# Altium PCB CH32F&Vx0xV-R1-1v1.PcbDoc (part 1 of 2)
Units mm, origin at the board's own origin, x right, y up, seen from the top; angles counter-clockwise.
Board outline 74 x 103.43 mm, 2 copper layers (Top Layer, Bottom Layer); 78 components, 138 nets, 482 pads, 658 vias.
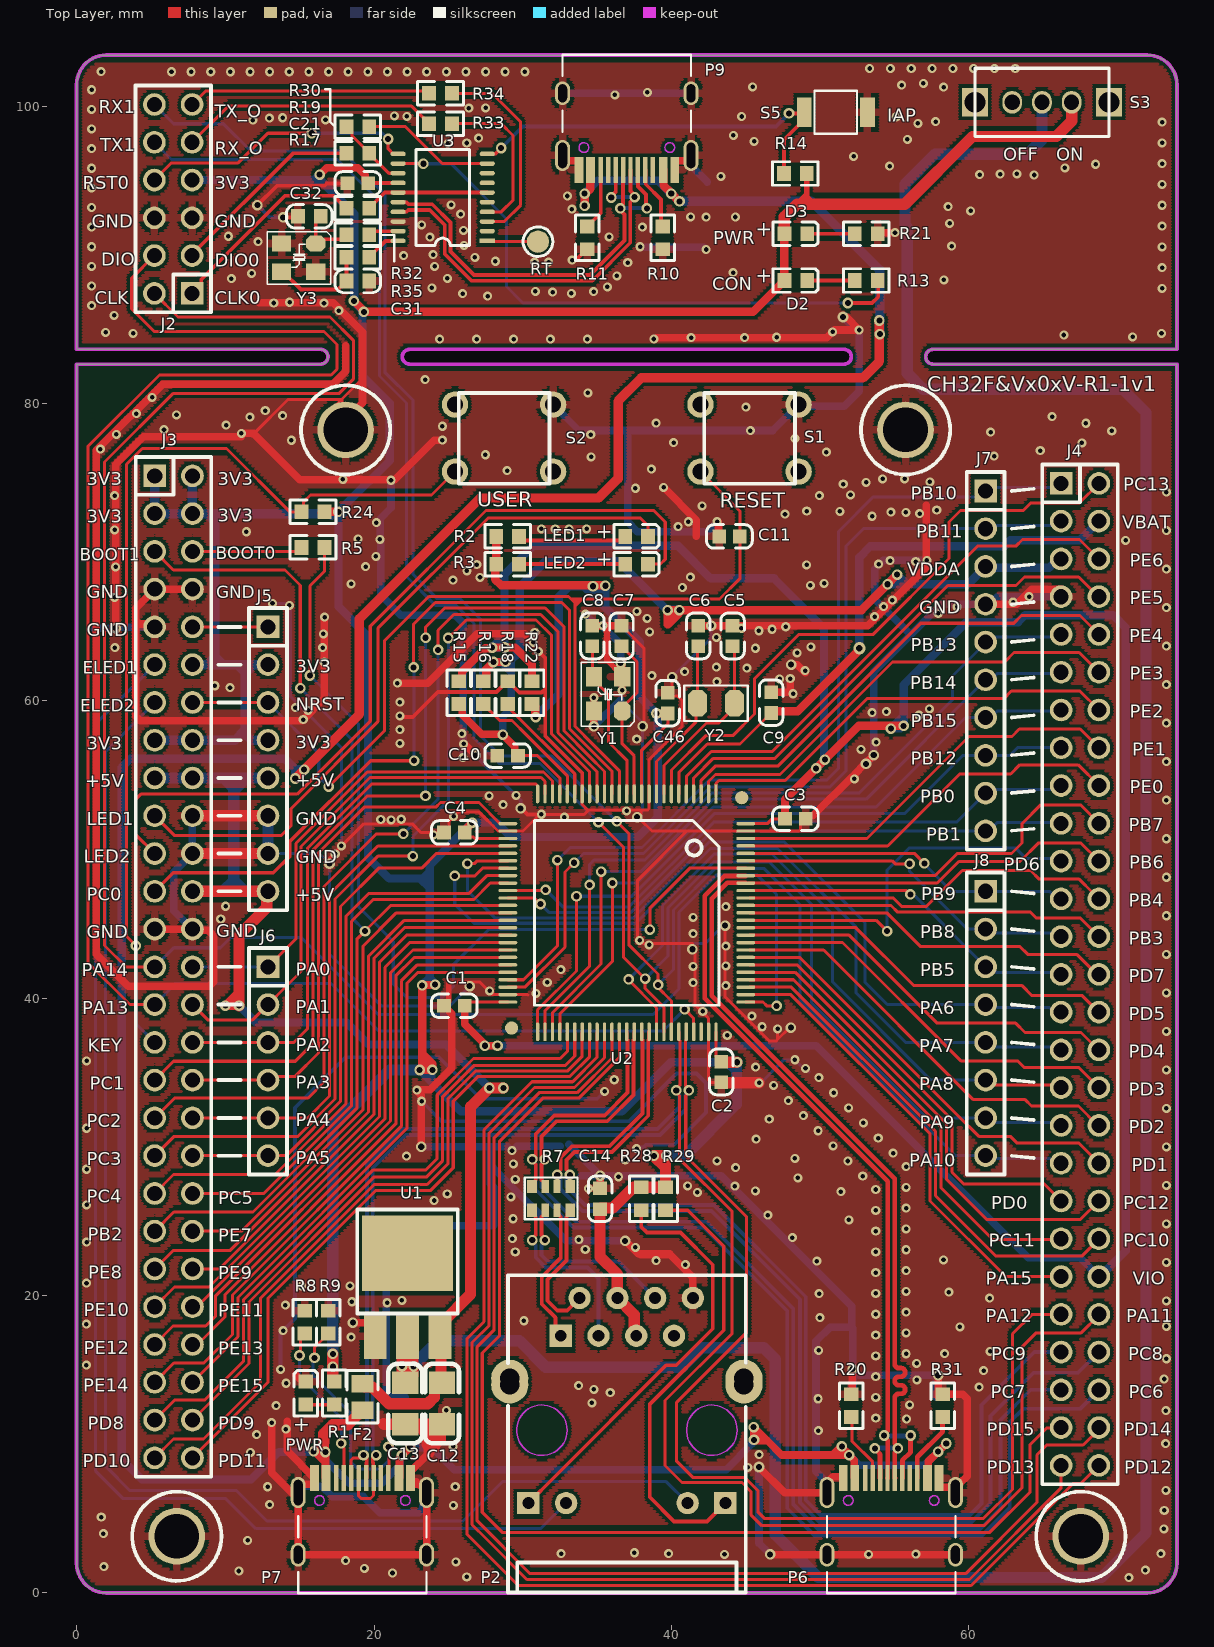
[diagram p0: Top Layer view]
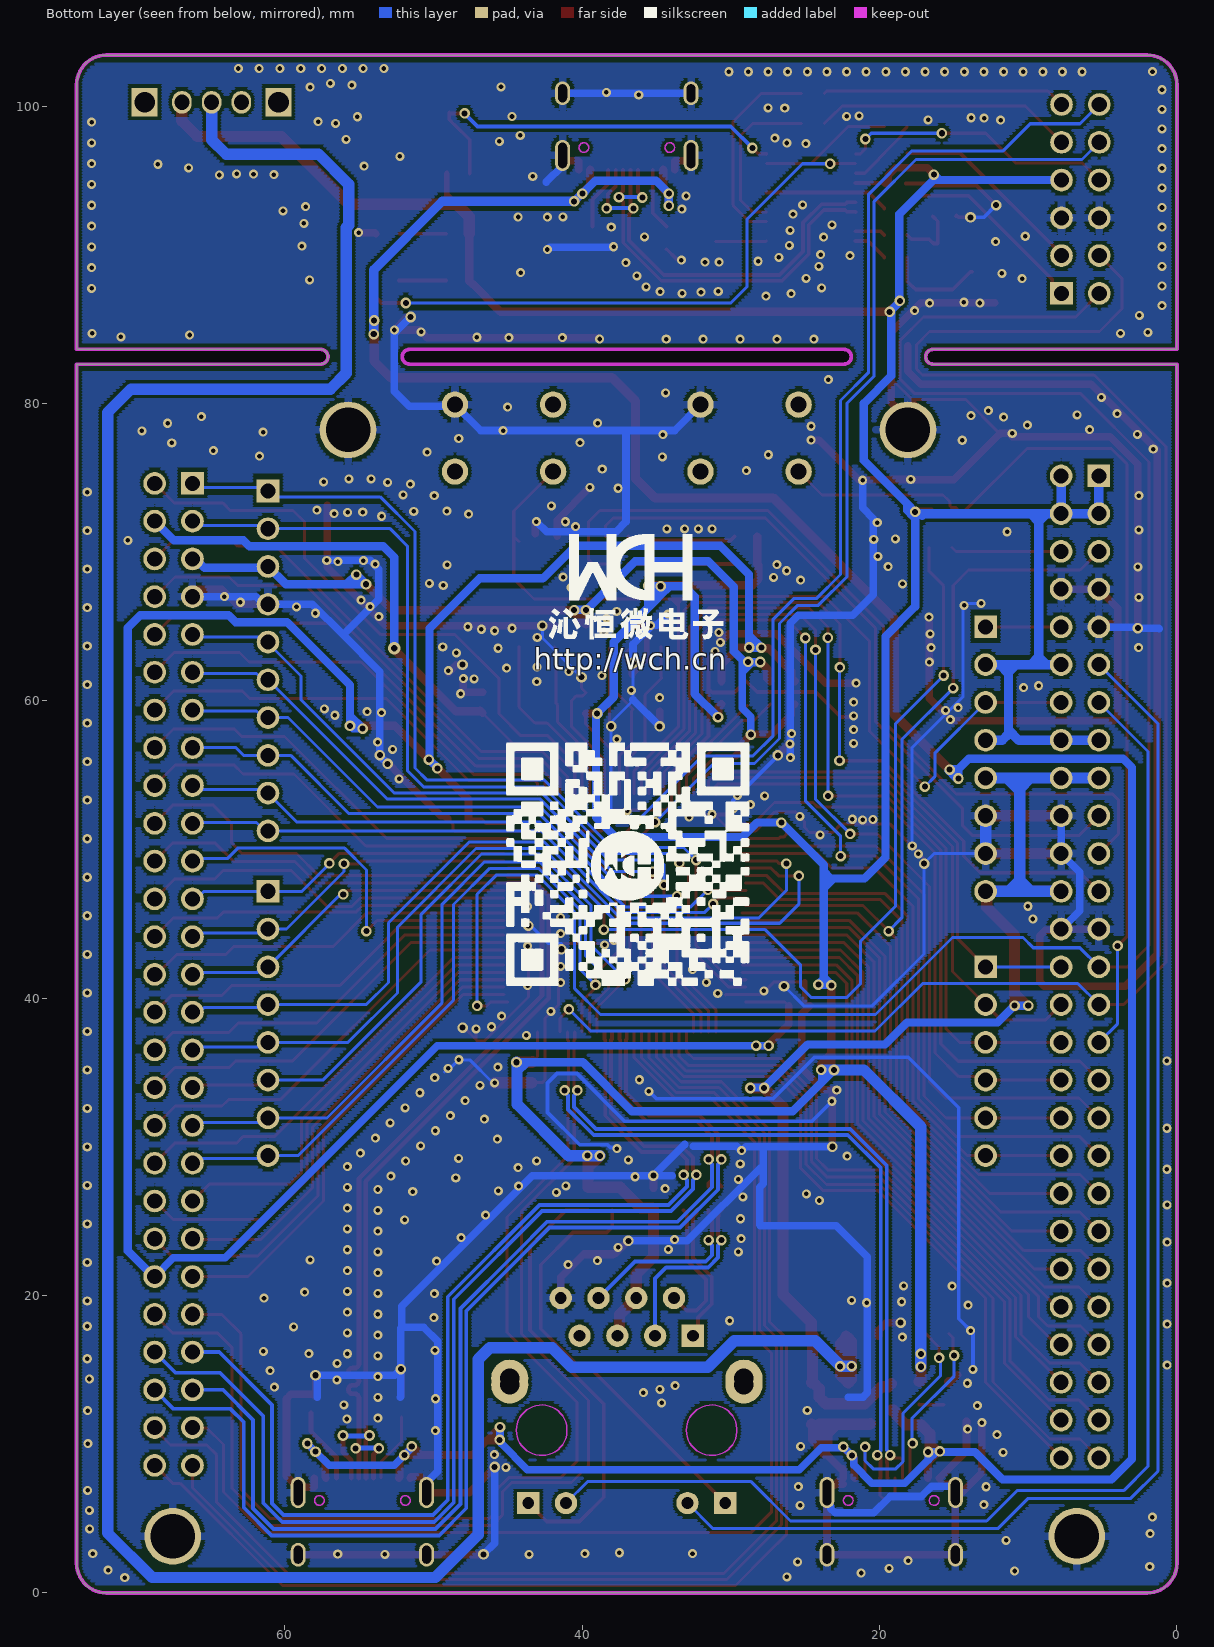
[diagram p1: Bottom Layer view, seen from below]

## Layer stack, top to bottom
Top Solder: solder mask 0.0102, Solder Resist, Dk 3.5
Top Layer: signal copper 0.0356
Dielectric 1: dielectric 0.32, FR-4, Dk 4.8
Bottom Layer: signal copper 0.0356
Bottom Solder: solder mask 0.0102, Solder Resist, Dk 3.5

## Board outline
2,0 cw(c2,2) 0,2 0,82.638 16.4,82.638 ccw(c16.4,83.138) 16.4,83.638 0,83.638 0,101.429 cw(c2,101.429) 2,103.429 72,103.429 cw(c72,101.429) 74,101.429 74,83.638 57.6,83.638 ccw(c57.6,83.138) 57.6,82.638 74,82.638 74,2 cw(c72,2) 72,0
cut-out: 22.4,82.638 51.65,82.638 51.6,82.636 ccw(c51.6,83.138) 51.6,83.641 51.65,83.638 22.4,83.638 ccw(c22.4,83.138)

## Design rules (kind name [scope] priority, off if disabled: settings)
Clearance Clearance_1 [InPolygon] p1: gap=0.203 ignorepadtopadclearanceinfootprint=FALSE
Clearance [All] p2: gap=0.14 ignorepadtopadclearanceinfootprint=FALSE
ComponentClearance [All] p1 off: gap=0.254 collisioncheckmode=3 verticalgap=0.254 showdistances=FALSE
DiffPairsRouting [All] p1: maxlimit=0.254 minlimit=0.14 mostfreqgap=0.203 toplayer_minwidth=0.152 toplayer_maxwidth=0.381 toplayer_prefwidth=0.254 bottomlayer_minwidth=0.152 bottomlayer_maxwidth=0.381 bottomlayer_prefwidth=0.254 maxuncoupledlength=12.7
MinimumSolderMaskSliver [All] p1 off: minsoldermaskwidth=0.254
PolygonConnect PolygonConnect_1 [IsVia] p1: connectstyle=Direct reliefconductorwidth=0.254 reliefentries=4 polygonreliefangle="90 Angle" airgapwidth=0.254
PolygonConnect [All] p2: connectstyle=Relief reliefconductorwidth=0.508 reliefentries=4 polygonreliefangle="90 Angle" airgapwidth=0.254
RoutingVias [All] p1: holewidth=0.406 width=0.711 viastyle="Through Hole" minholewidth=0.305 minwidth=0.61 maxholewidth=0.711 maxwidth=1.27
SilkToSilkClearance [All] p1 off: silktosilkclearance=0.254
SilkToSolderMaskClearance [IsPad] p1 off: minsilkscreentomaskgap=0.254 clearancetoexposedcopper=TRUE
SolderMaskExpansion [All] p1: expansion=0.102 istentingtop=FALSE
Width [All] p1: maxlimit=2.54 minlimit=0.152 preferedwidth=0.254
25 further rules are at their usual default settings.

## Classes and differential pairs
component class CH32F&Vx0xV-R1-1v1: C1 C2 C3 C4 C5 C6 C7 C8 C9 C10 C11 C12 C13 C14 C21 C31 C32 C46 D2 D3 F2 J2 J3 J4 J5 J6 J7 J8 LED1 LED2 P2 P6 P7 P9 PWR R1 R2 R3 R5 R7 R8 R9 R10 R11 R13 R14 R15 R16 R17 R18 R19 R20 R21 R22 R24 R28 R29 R30 R31 R32 R33 R34 R35 RT S1 S2 S3 S5 U1 U2 U3 Y1 Y2 Y3
differential pair ERX1: +ERXP1 -ERXN1
differential pair ETX1: +ETXN1 -ETXP1

## Components (designator, comment, footprint, x,y, rotation, side; value= is the part's Value field where it differs from the comment)
C1 "0.1uF" 0603_C#1 24.706,39.486 r0 top
C2 "0.1uF" 0603_C#1 43.346,34.34 r90 top
C3 "0.1uF" 0603_C#1 47.642,52.059 r0 top
C4 "0.1uF" 0603_C#1 24.706,51.145 r0 top
C5 "12pF" 0603_C#1 44.112,63.663 r90 top
C6 "12pF" 0603_C#1 41.8,63.663 r90 top
C7 "22pF" 0603_C#1 36.644,65.059 r270 top
C8 "22pF" 0603_C#1 34.688,65.059 r270 top
C9 "0.1uF" 0603_C#1 46.704,60.576 r270 top
C10 "0.1uF" 0603_C#1 28.285,56.316 r0 top
C11 "0.1uF" 0603_C#1 43.205,71.051 r0 top
C12 "10uF" 3216_C 24.572,14.136 r90 top
C13 "10uF" 3216_C 22.1,14.136 r90 top
C14 "1uF" 0603_C#1 35.199,27.21 r270 top
C21 "0.1uF" 0603_C#1 19.612,94.793 r180 top
C31 "NC(22pF)" 0603_C#2 19.683,88.232 r180 top
C32 "NC(22pF)" 0603_C#2 14.877,92.58 r0 top
C46 "0.1uF" 0603_C#1 39.743,59.146 r90 top
D2 "BLUE" 0603+ 47.599,88.266 r0 top
D3 "RED" 0603+ 47.599,91.402 r0 top
F2 "500mA" 0805 19.221,12.295 r90 top
J2 "Header 6X2" IDC12-2.54mm 7.765,87.401 r180 top
J3 "HEADER 27x2" IDC54-2.54MM 5.25,75.128 r0 top locked
J4 "HEADER 27x2" IDC54-2.54MM 66.21,74.62 r0 top locked
J5 "Header 8" SIP8-2.54mm 12.87,64.968 r0 top locked
J6 "Header 6" SIP6-2.54MM 12.87,42.108 r0 top locked
J7 "Header 10" SIP10-2.54mm 61.13,74.112 r0 top locked
J8 "Header 8" SIP8-2.54mm 61.13,47.188 r0 top locked
LED1 "LED1   blue" 0603+ 36.891,71.051 r0 top
LED2 "LED2  blue" 0603+ 36.891,69.193 r0 top
P2 "HR911105A" HR911105A 32.555,17.295 r0 top
P6 "USBHS" TYPE-C-Receptacle-2.0 54.783,7.722 r0 top
P7 "USBFS" TYPE-C-Receptacle-2.0 19.217,7.722 r0 top
P9 "TYPE-C" TYPE-C-Receptacle-2.0 37,95.706 r180 top
PWR "POWER  red" 0603+ 15.42,12.675 r90 top
R1 "1K" 0603 17.325,12.675 r90 top
R2 "1K" 0603 28.218,71.051 r0 top
R3 "1K" 0603 28.218,69.193 r0 top
R5 "10K" 0603 15.127,70.311 r0 top
R7 "0Ω" RCA-8P4R-0603 31.908,26.538 r180 top
R8 "NC(5.1K)" 0603 15.327,18.98 r270 top
R9 "NC(5.1K)" 0603 16.918,18.98 r270 top
R10 "NC(5.1K)" 0603 39.41,91.902 r270 top
R11 "NC(5.1K)" 0603 34.337,91.902 r270 top
R13 "1K" 0603 53.873,88.266 r180 top
R14 "10K" 0603 47.564,95.462 r0 top
R15 "0Ω" 0603 25.708,61.316 r270 top
R16 "0Ω" 0603 27.347,61.316 r270 top
R17 "100" 0603 18.143,93.113 r0 top
R18 "0Ω" 0603 28.986,61.316 r270 top
R19 "100" 0603 18.143,96.816 r0 top
R20 "NC(5.1K)" 0603 52.088,13.365 r270 top
R21 "1K" 0603 53.873,91.402 r180 top
R22 "0Ω" 0603 30.625,61.316 r270 top
R24 "10K" 0603 15.127,72.706 r0 top
R28 "1K" 0603 37.973,27.281 r270 top
R29 "1K" 0603 39.605,27.281 r270 top
R30 "1K" 0603 18.143,98.608 r0 top
R31 "NC(5.1K)" 0603 58.237,13.365 r270 top
R32 "NC(0R)" 0603 19.683,91.329 r180 top
R33 "270" 0603 23.701,98.814 r0 top
R34 "270" 0603 23.701,100.855 r0 top
R35 "NC(0R)" 0603 19.683,89.821 r180 top
RT "Testpoint" TESTPOINT1 31.026,90.879 r0 top
S1 "RESET" KEYX 41.955,75.418 r90 top locked
S2 "USER" KEYX 25.445,75.418 r90 top locked
S3 "SW" SW1 64.92,100.252 r0 top
S5 "KEY" 贴片按键 48.938,99.583 r0 top
U1 "1117-3.3V" SOT-223 20.072,17.271 r0 top
U2 "CH32V307V" LQFP100 43,53.74 r180 top locked
U3 "CH32V305F" TSSOP20 27.615,90.93 r90 top
Y1 "8M" XT3225 36.69,59.31 r90 top
Y2 "32.768k" FC-135 44.249,59.832 r180 top
Y3 "NC(12M)" XT3225 16.083,90.753 r180 top
? "Comment" HOLE 18.092,78.217 r0 top
? "Comment" HOLE 55.746,78.217 r0 top
? "Comment" HOLE 6.736,3.81 r0 top
? "Comment" HOLE 67.532,3.81 r0 top

## Footprints (in the part's own frame and the unit in brackets; to place one, negate y for a bottom-side part, rotate by r counter-clockwise, add the part's x,y. Pads: shape width x height; smd on the part's side, far side on the other; paste and mask are expansions set on the pad)
0603 [mm]
  rect 0.93x0.98 smd: 1(0,0) 2(1.54,0)
  silkscreen extent -0.76,-0.79 2.3,0.79
0603+ [mm]
  rect 0.93x0.98 smd: 1(0,0) 2(1.54,0)
  silkscreen extent -0.76,-0.79 2.27,0.79
0603_C#1 [mil]
  rect 36x36 smd: 1(0,0) 2(55,0)
  silkscreen extent -33,-31 88,31
0603_C#2 [mil]
  rect 36.61x38.58 smd mask+2: 1(0,0) 2(60.63,0)
  silkscreen extent -30,-31 91,31
0805 [mm]
  rect 1.16x1.47 smd: 1(0,0) 2(1.78,0)
  silkscreen extent -0.88,-1.04 2.66,1.03
3216_C [mil]
  rect 60x70 smd: 1(0,0) 2(-110,0)
  silkscreen extent -160,-45 50,45
FC-135 [mil]
  oct 50x70 smd: 1(0,0) 2(98.43,0)
  silkscreen extent -35,-47 133,47
HOLE [mm]
  round 3.81 hole 3: 0(0,0)
  silkscreen extent -3,-3 3,3
HR911105A [mm]
  rect 1.5x1.5 hole 0.8: 1(0,0) 9(-2.175,-11.252) 12(11.075,-11.252)
  round 1.5 hole 0.8: 2(1.27,2.54) 3(2.54,0) 4(3.81,2.54) 5(5.08,0) 6(6.35,2.54) 7(7.62,0) 8(8.89,2.54) 10(0.365,-11.252) 11(8.535,-11.252)
  round 2.5 hole 1.3: ""(-3.43,-2.852) ""(-3.43,-3.3) ""(12.32,-3.3) ""(12.32,-2.852)
  Keep-Out Layer circle w0.1: c-1.265,-6.352 r1.7
  Keep-Out Layer circle w0.1: c10.165,-6.352 r1.7
  silkscreen extent -3.55,-17.27 12.45,4.06
IDC12-2.54mm [mil]
  rect 60x60 hole 40: 1(0,0)
  round 60 hole 40: 2(100,0) 3(0,-100) 4(100,-100) 5(0,-200) 6(100,-200) 7(0,-300) 8(100,-300) 9(0,-400) 10(100,-400) 11(0,-500) 12(100,-500)
  silkscreen extent -50,-550 150,50
IDC54-2.54MM [mil]
  rect 60x60 hole 40: 1(0,0)
  round 60 hole 40: 2(100,0) 3(0,-100) 4(100,-100) 5(0,-200) 6(100,-200) 7(0,-300) 8(100,-300) 9(0,-400) 10(100,-400) 11(0,-500) 12(100,-500) 13(0,-600) 14(100,-600) 15(0,-700) 16(100,-700) 17(0,-800) 18(100,-800) 19(0,-900) 20(100,-900) 21(0,-1000) 22(100,-1000) 23(0,-1100) 24(100,-1100) 25(0,-1200) 26(100,-1200) 27(0,-1300) 28(100,-1300) 29(0,-1400) 30(100,-1400) 31(0,-1500) 32(100,-1500) 33(0,-1600) 34(100,-1600) 35(0,-1700) 36(100,-1700) 37(0,-1800) 38(100,-1800) 39(0,-1900) 40(100,-1900) 41(0,-2000) 42(100,-2000) 43(0,-2100) 44(100,-2100) 45(0,-2200) 46(100,-2200) 47(0,-2300) 48(100,-2300) 49(0,-2400) 50(100,-2400) 51(0,-2500) 52(100,-2500) 53(0,-2600) 54(100,-2600)
  silkscreen extent -50,-2650 150,50
KEYX [mil]
  round 70 hole 42: 1(0,0) 2(0,-259.84) 3(177.17,-259.84) 4(177.17,0)
  silkscreen extent -32,-250 208,-10
LQFP100 [mm]
  round 0.889 smd: 0(-1.727,0.254) 0(13.746,15.748)
  rect 0.229x1.27 smd: 1(0,0)
  oval 0.229x1.27 smd: 2(0.5,0) 3(1,0) 4(1.5,0) 5(2,0) 6(2.5,0) 7(3,0) 8(3.5,0) 9(4,0) 10(4.5,0) 11(5,0) 12(5.5,0) 13(6,0) 14(6.5,0) 15(7,0) 16(7.5,0) 17(8,0) 18(8.5,0) 19(9,0) 20(9.5,0) 21(10,0) 22(10.5,0) 23(11,0) 24(11.5,0) 25(12,0) 51(12,16) 52(11.5,16) 53(11,16) 54(10.5,16) 55(10,16) 56(9.5,16) 57(9,16) 58(8.5,16) 59(8,16) 60(7.5,16) 61(7,16) 62(6.5,16) 63(6,16) 64(5.5,16) 65(5,16) 66(4.5,16) 67(4,16) 68(3.5,16) 69(3,16) 70(2.5,16) 71(2,16) 72(1.5,16) 73(1,16) 74(0.5,16) 75(0,16)
  oval 1.27x0.229 smd: 26(14,2) 27(14,2.5) 28(14,3) 29(14,3.5) 30(14,4) 31(14,4.5) 32(14,5) 33(14,5.5) 34(14,6) 35(14,6.5) 36(14,7) 37(14,7.5) 38(14,8) 39(14,8.5) 40(14,9) 41(14,9.5) 42(14,10) 43(14,10.5) 44(14,11) 45(14,11.5) 46(14,12) 47(14,12.5) 48(14,13) 49(14,13.5) 50(14,14) 76(-2,14) 77(-2,13.5) 78(-2,13) 79(-2,12.5) 80(-2,12) 81(-2,11.5) 82(-2,11) 83(-2,10.5) 84(-2,10) 85(-2,9.5) 86(-2,9) 87(-2,8.5) 88(-2,8) 89(-2,7.5) 90(-2,7) 91(-2,6.5) 92(-2,6) 93(-2,5.5) 94(-2,5) 95(-2,4.5) 96(-2,4) 97(-2,3.5) 98(-2,3) 99(-2,2.5) 100(-2,2)
  silkscreen extent -0.22,1.79 12.21,14.21
RCA-8P4R-0603 [mm]
  rect 0.65x0.9 smd: 1(-1.28,-0.8) 4(1.28,-0.8) 5(1.28,0.8) 8(-1.28,0.8)
  rect 0.5x0.9 smd: 2(-0.4,-0.8) 3(0.4,-0.8) 6(0.4,0.8) 7(-0.4,0.8)
  silkscreen extent -1.78,-1.4 1.78,1.4, body extent -1.6,-0.8 1.6,0.8, height 0.6
SIP6-2.54MM [mil]
  rect 60x60 hole 40: 1(0,0)
  round 60 hole 40: 2(0,-100) 3(0,-200) 4(0,-300) 5(0,-400) 6(0,-500)
  silkscreen extent -50,-550 50,50
SIP8-2.54mm [mil]
  rect 60x60 hole 40: 1(0,0)
  round 60 hole 40: 2(0,-100) 3(0,-200) 4(0,-300) 5(0,-400) 6(0,-500) 7(0,-600) 8(0,-700)
  silkscreen extent -50,-750 50,50
SIP10-2.54mm [mil]
  rect 60x60 hole 40: 1(0,0)
  round 60 hole 40: 2(0,-100) 3(0,-200) 4(0,-300) 5(0,-400) 6(0,-500) 7(0,-600) 8(0,-700) 9(0,-800) 10(0,-900)
  silkscreen extent -50,-950 50,50
SOT-223 [mil]
  rect 60x120 smd: 1(0,0) 2(86,0) 3(172,0)
  rect 240x200 smd: ""(86,220)
  silkscreen extent -47,60 219,335
SW1 [mm]
  rect 1.75x1.9 hole 1.4: 0(-4.5,0) 0(4.5,0)
  oval 1.321x1.524 hole 1.016: 1(0,0) 2(-2,0) 3(2,0)
  silkscreen extent -4.51,-2.31 4.5,2.29
TESTPOINT1 [mm]
  round 1.5 smd: 1(0,0)
  silkscreen extent -1,-1 1,1
TSSOP20 [mil]
  rect 12x40 smd: 1(0,0)
  oval 12x40 smd: 2(25.6,0) 3(51.2,0) 4(76.8,0) 5(102.4,0) 6(128,0) 7(153.5,0) 8(179.1,0) 9(204.7,0) 10(230.3,0) 11(230.3,236) 12(204.7,236) 13(179.1,236) 14(153.5,236) 15(128,236) 16(102.4,236) 17(76.8,236) 18(51.2,236) 19(25.6,236) 20(0,236)
  silkscreen extent -13,47 242,189
TYPE-C-Receptacle-2.0 [mm]
  oval 1x1.6 hole 0.6 slot 1.2 at 90 deg: 0(-4.32,-5.15) 0(4.32,-5.15)
  oval 1x2.1 hole 0.6 slot 1.7 at 90 deg: 0(-4.32,-0.97) 0(4.32,-0.97)
  rect 0.6x1.75 smd: A1(-3.225,0) A4(-2.45,0) B1(3.225,0) B4(2.45,0)
  rect 0.3x1.75 smd: A5(-1.25,0) A6(-0.25,0) A7(0.25,0) A8(1.25,0) B5(1.75,0) B6(0.75,0) B7(-0.75,0) B8(-1.75,0)
  Keep-Out Layer circle w0.1: c2.89,-1.5 r0.325
  Keep-Out Layer circle w0.1: c-2.89,-1.5 r0.325
  silkscreen extent -4.32,-7.75 4.32,-2.55
XT3225 [mm]
  oct 1.3x1.1 smd: 1(0,0)
  rect 1.3x1.1 smd: 2(2.3,0) 3(2.3,1.9) 4(0,1.9)
  silkscreen extent -1.02,-0.8 3.27,2.74
贴片按键 [mm]
  rect 1x2 smd: 1(0,0) 2(4.242,0)
  silkscreen extent 0.69,-1.45 3.55,1.45

## Part data
C1 C2 C3 C4 C9 C10 C12 C13 C14 C46: library part CAP, "Capacitor"
C5 C6 C7 C8 C11 C21 C31 C32: library part Cap, "Capacitor"
  C31 C32: LatestRevisionDate=17-Jul-2002, LatestRevisionNote="Re-released for DXP Platform.", PackageReference=RAD-0.3, Published=8-Jun-2000, Publisher="Altium Limited"
D2 D3: library part D0603, "Typical RED, GREEN, YELLOW, AMBER GaAs LED", LatestRevisionDate=17-Jul-2002, LatestRevisionNote="Re-released for DXP Platform.", PackageDescription="SM LED; 2 Flat Leads", PackageReference=3.2X1.6X1.1, PackageVersion=Feb-2002, Published=8-Jun-2000, Publisher="Altium Limited"
F2: library part FUSE1, "Fuse"
J2: "Header, 6-Pin, Dual row", LatestRevisionDate=17-Jul-2002, LatestRevisionNote="Re-released for DXP Platform.", Publisher="Altium Limited"
J3 J4: "Header, 27-Pin, Dual row"
J5 J8: "Header, 8-Pin", LatestRevisionDate=17-Jul-2002, LatestRevisionNote="Re-released for DXP Platform.", Publisher="Altium Limited"
J6: "Header, 6-Pin", LatestRevisionDate=17-Jul-2002, LatestRevisionNote="Re-released for DXP Platform.", Publisher="Altium Limited"
J7: "Header, 10-Pin", LatestRevisionDate=17-Jul-2002, LatestRevisionNote="Re-released for DXP Platform.", Publisher="Altium Limited"
LED1 LED2 PWR: library part LED0, "Typical INFRARED GaAs LED", LatestRevisionDate=08-Jul-2005, LatestRevisionNote="Mech Layer 1 removed.", PackageReference=LED-0, Published=8-Jun-2000, Publisher="Altium Limited"
P6 P7 P9: library part TYPE-C1
R1 R2 R3: library part "Res Semi", "Semiconductor Resistor"
R5 R8 R9 R10 R11 R15 R16 R18 R20 R22 R24 R31: library part Res2, "Resistor"
R7: library part R-8P4R, "贴片网络排阻", BOM名称=贴片网络排阻, 学习资源=www.ooocke.com, 版权归属=源创客
R13 R14 R17 R19 R21 R30 R32 R33 R34 R35: library part R0603, "Resistor", LatestRevisionDate=17-Jul-2002, LatestRevisionNote="Re-released for DXP Platform.", PackageDescription="Axial Device, Thru-Hole; 2 Leads; 0.3 in Pin Spacing", PackageReference=AXIAL-0.3, Published=8-Jun-2000, Publisher="Altium Limited"
R28 R29: library part RES
RT: "测试点"
S1 S2: library part "SW PUSHBUTTON", "SE PUSHBUTTON"
U2: "RISC-V FPU HD-MCU, 144MHz, USB_480M, USB OTG, 1000M Ethernet MAC, 2*CAN, FSMC+DVP"
U3: "RISC-V FPU HD-MCU, 144MHz, USB_480M, CAN, UART*2, SPI"
Y1 Y2 Y3: library part XTAL, "Crystal Oscillator"
  Y1 Y2: LatestRevisionDate=17-Jul-2002, LatestRevisionNote="Re-released for DXP Platform.", PackageReference=R38, Published=8-Jun-2000, Publisher="Altium Limited"

## Via types
v1: diameter 0.61, hole 0.305, Top Layer to Bottom Layer, tented both sides, 509 vias
v2: diameter 0.711, hole 0.406, Top Layer to Bottom Layer, tented both sides, 148 vias
v3: diameter 0.813, hole 0.457, Top Layer to Bottom Layer, tented both sides, 1 vias

## Nets (pads, with @x,y where several pads share a name; then routed paths per layer and width w, separated by ;. In a path a pad name is that pad's centre, name@x,y a point inside that pad or via, vN(x,y) a via of type N, cw(c..) or ccw(c..) an arc to the next point about the centre after c; other vN are vias at no path point)
5V_in: F2.1 P6.A4 P6.B4 P7.A4 P7.B4 P9.A4 P9.B4 | length 242.9
  Top Layer w0.508: v2(15.944,9.517) v2@15.981,9.517 ; v2@16.017,9.499 v2@16.713,9.499 ; P7.A4@16.767,7.722 P7.A4@16.749,7.74 ; v2@21.749,9.118 21.713,9.081 21.713,7.768 P7.B4@21.667,7.722 21.693,7.748 21.693,8.966 21.828,9.1 21.828,9.211 v2(21.866,9.25) ; v2@21.899,9.25 v2@22.401,9.752 ; v2(45.529,11.154) v2@45.541,11.142 ; v2@45.619,10.303 v2@45.541,10.303 ; P6.A4@52.333,7.722 52.287,7.768 52.287,8.923 51.957,9.252 v2(51.957,9.273) ; P6.B4@57.233,7.722 57.279,7.768 57.279,8.823 ; v2(57.936,9.509) 57.279,8.852 57.279,8.823 ; v2(58.484,10.051) 58.484,10.027 57.279,8.823 ; v2@15.981,9.517 16.721,8.776 16.721,7.768 P7.A4@16.749,7.74 ; v2@15.981,9.517 15.999,9.517 16.611,10.128 16.643,10.16 16.73,10.16 16.73,9.517 v2@16.713,9.499 ; v2@16.713,9.499 v2(16.73,9.481) 16.749,9.463 16.749,8.776 P7.A4@16.749,7.74 ; v2@45.541,10.303 v2@45.541,11.142 ; v2@45.541,10.303 v2(45.552,10.292) 45.591,10.253 46.43,10.253 ; v2@45.541,11.142 46.43,10.253 ; 46.43,10.253 47.407,9.276 47.661,9.276 50.824,9.276 ; 50.824,9.276 51.955,9.276 v2(51.957,9.273) ; 50.824,9.276 51.407,9.859 v2(51.462,9.859) 51.462,9.814 51.957,9.318 v2(51.957,9.273)
  Top Layer w0.559: v2(34.165,94.112) 34.194,94.141 34.263,94.141 34.55,94.428 P9.B4@34.55,95.706 ; v2(34.169,93.292) v2@34.169,94.112 ; P9.A4@39.45,95.706 39.471,95.685 39.471,94.662 39.99,94.143 v2(39.99,94.101) 40.019,94.072 40.042,94.072 40.523,93.591 v2(40.546,93.591)
  Top Layer w0.635: v2(14.703,54.775) v2(15.294,55.366) 19.011,59.083 19.011,65.506 27.142,73.637 35.105,73.637 36.414,74.946 36.414,80.16 37.968,81.714 52.878,81.714 53.99,82.825 53.99,84.655 v2(53.99,85.577)
  Top Layer w0.762: 16.611,10.128 16.611,10.7 17.233,11.322 18.248,11.322 18.867,11.941 18.867,12.096 19.066,12.295 F2.1@19.221,12.295
  Bottom Layer w0.508: v2(16.73,9.481) 16.73,8.968 18.32,7.378 20.52,7.378 21.749,8.607 21.749,9.078 21.828,9.156 v2@21.78,9.204 ; v2(21.866,9.25) v2(21.866,9.25) 22.368,9.753 22.406,9.753 22.435,9.781 22.616,9.781 22.644,9.753 23.931,9.753 25.391,8.293 43.692,8.293 45.451,10.051 45.451,10.135 45.529,10.213 v2(45.529,11.154) ; v2(51.462,9.859) 51.462,9.804 51.537,9.729 51.537,9.694 v2(51.957,9.273) 52.639,8.592 57.018,8.592 v2(57.936,9.509) 57.942,9.509 v2(58.484,10.051)
  Bottom Layer w0.559: v2(14.703,54.775) 14.703,55.403 ; v2@14.71,54.783 14.732,54.804 14.843,54.804 15.072,55.033 ; v2(15.294,55.366) 15.264,55.395 14.71,55.395 ; v2@15.349,55.311 15.072,55.033 ; 16.73,8.968 v2@16.217,9.481 ; v2(16.73,9.481) v2@16.217,9.481 ; v2(34.165,94.112) v2@34.169,94.116 ; v2(34.169,93.292) v2@34.169,94.116 ; v2@39.776,94.253 v2@39.838,94.253 ; v2@39.884,94.253 v2(40.546,93.591) ; v2(39.99,94.101) v2@39.838,94.253 ; 14.703,55.403 14.71,55.395 ; 14.703,55.403 13.997,56.109 3.623,56.109 3.029,55.514 3.029,49.932 3.029,9.002 4.402,7.628 11.73,7.628 13.583,9.481 15.944,9.481 v2@16.217,9.481 ; 14.71,55.395 15.072,55.033 ; v2@34.169,94.116 35.036,94.983 39.108,94.983 v2@39.838,94.253
  Bottom Layer w0.635: v2(40.546,93.591) 49.406,93.591 54.018,88.979 v2(54.018,84.655)
  other v2: 22.433,9.82
+5V: C12.1 F2.2 J3.17 J3.18 J3.24 J5.5 J5.8 U1.3 | length 90.3
  Top Layer w0.559: v2(10.921,39.496) v2(10.001,39.496) 10.875,40.371 10.921,40.371
  Top Layer w0.762: J3.24@7.79,47.188 J5.8@12.87,47.188 12.783,47.102 12.783,46.105 10.921,44.243 10.921,40.371 v2(10.921,39.496) ; J5.5@12.87,54.808 J5.5@12.953,54.808 ; F2.2@19.221,14.075 19.42,13.876 19.852,13.876 20.468,13.261 20.473,13.261 21.008,12.725 23.617,12.725 24.064,13.171 24.064,13.755 24.445,14.136 C12.1@24.572,14.136 24.506,14.201 24.506,17.205 U1.3@24.441,17.271 24.595,17.425 24.595,18.187 26.491,20.083 26.491,32.689 v2(27.762,33.96) v2(28.694,33.96)
  Bottom Layer w0.559: v2(10.001,39.496) v2(10.921,39.496) 12.056,38.362 18.161,38.362 19.64,36.883 24.839,36.883 v2@27.733,33.989 ; v2(27.762,33.96) v2@27.733,33.989 ; v2(28.694,33.96) 28.665,33.989 v2@27.733,33.989
  Bottom Layer w0.762: J3.17@5.25,54.808 J3.18@7.79,54.808 9.874,54.808 ; J3.24@7.79,47.188 9.865,47.188 ; 10.575,54.722 10.575,54.107 ; J5.8@12.87,47.188 11.286,47.188 ; J5.5@12.87,54.808 11.42,54.808 ; 9.865,47.188 10.575,47.188 ; 9.865,47.188 10.575,47.899 ; 9.874,54.808 11.42,54.808 ; 9.874,54.808 10.575,54.107 ; 10.575,47.188 11.286,47.188 ; 10.575,47.188 10.575,47.899 ; 10.575,47.899 10.575,53.964 ; 10.575,47.899 11.286,47.188 ; 10.575,53.964 10.575,54.107 ; 10.575,53.964 11.42,54.808
BOOT0: R5.2 U2.94 | length 61.5
  Top Layer w0.203: v2(15.691,61.699) 15.691,67.733 16.667,68.71 R5.2@16.667,70.311 ; v2(38.546,44.609) 38.546,46.053 41.233,48.74 U2.94@45,48.74
  Bottom Layer w0.203: v2(15.691,61.699) 18.944,58.446 18.944,46.167 21.294,43.817 21.294,40.956 22.2,40.05 24.601,40.05 25.333,40.781 25.333,42.249 27.693,44.609 32.292,44.609 v2(38.546,44.609)
BOOT1: J3.5 J3.41 U2.37 | length 75.3
  Top Layer w0.203: J3.41@5.25,24.328 6.536,25.614 11.857,25.614 18.847,32.604 18.847,43.97 v2(19.392,44.515) 21.117,46.24 U2.37@29,46.24 ; J3.5@5.25,70.048 6.507,68.792 14.013,68.792 15.05,67.754
  Top Layer w0.229: v2(15.05,60.852) 15.05,67.754
  Bottom Layer w0.203: v2(15.05,60.852) 18.507,57.396 18.507,45.4 v2(19.392,44.515)
CLK: J2.2 J3.27 U2.76 | length 134.7
  Top Layer w0.203: J2.2@5.225,87.401 6.812,85.814 17.041,85.814 18.612,84.243 18.612,81.63 17.662,80.68 6.5,80.68 1.874,76.054 1.874,43.55 3.315,42.108 J3.27@5.25,42.108 ; U2.76@45,39.74 46.153,39.74 46.409,39.484 v2(47.071,39.484)
  Bottom Layer w0.203: J3.27@5.25,42.108 6.533,43.391 9.672,43.391 10.36,44.078 15.101,44.078 20.277,38.902 38.772,38.902 40.504,40.635 40.504,45.77 43.008,48.274 45.782,48.274 47.071,46.985 v2(47.071,39.484)
CLK0: J2.1 R17.1 | length 13.7
  Top Layer w0.254: J2.1@7.765,87.401 8.382,88.018 8.382,88.339 14.011,93.968 17.287,93.968 17.78,93.476 17.805,93.476 18.143,93.138 R17.1@18.143,93.113
D_SWCLK: R17.2 U3.6 U3.15 | length 8.4
  Top Layer w0.254: R17.2@19.683,93.113 19.683,93.138 20.727,94.181 U3.15@21.621,94.181 U3.6@27.615,94.181
D_SWDIO: R19.2 R30.1 U3.13 | length 4.9
  Top Layer w0.203: R30.1@18.143,98.608 18.507,98.244 18.507,98.018 19.683,96.841 R19.2@19.683,96.816 20.047,96.453 20.047,96.428 20.995,95.479 U3.13@21.621,95.479
DIO: J2.4 J3.29 U2.72 | length 119.9
  Top Layer w0.203: J2.4@5.225,89.941 3.706,88.423 3.706,86.347 5.215,84.838 16.636,84.838 17.508,83.966 17.508,82.303 17.119,81.914 5.568,81.914 0.753,77.098 0.753,42.403 3.587,39.568 J3.29@5.25,39.568 ; v2(40.892,39.246) 41.5,38.638 U2.72@41.5,37.74
  Bottom Layer w0.203: J3.29@5.25,39.568 6.674,40.992 17.105,40.992 20.311,37.786 39.431,37.786 v2(40.892,39.246)
DIO0: J2.3 R19.1 | length 13.3
  Top Layer w0.254: J2.3@7.765,89.941 7.765,90.026 14.555,96.816 R19.1@18.143,96.816
ELED1: J3.11 P2.10 | length 89.8
  Bottom Layer w0.203: J3.11@5.25,62.428 1.278,58.457 1.278,8.187 3.102,6.364 10.002,6.364 12.047,4.319 31.196,4.319 P2.10@32.92,6.043
ELED2: J3.13 P2.11 | length 95.1
  Bottom Layer w0.203: J3.13@5.25,59.888 1.952,56.591 1.952,8.513 3.587,6.878 10.752,6.878 12.794,4.835 25.989,4.835 28.638,7.484 39.649,7.484 P2.11@41.09,6.043
ERXN: J4.49 R7.3 U2.64 | length 76.7
  Top Layer w0.254: v2@31.264,29.159 31.264,30.705 32.281,31.722 35.681,31.722 37.447,33.487 37.447,37.191 37.5,37.244 U2.64@37.5,37.74 ; v2(31.493,29.159) 31.493,29.04 31.264,28.811 31.264,28.172 31.264,27.773 31.376,27.661 31.385,27.661 31.508,27.538 R7.3@31.508,27.338
  Bottom Layer w0.254: v2(31.493,29.159) 31.493,29.04 31.264,28.811 31.264,27.285 33.585,24.964 42.357,24.964 44.47,22.851 48.187,19.135 48.187,5.978 49.865,4.301 60.765,4.301 62.137,5.672 62.137,11.636 64.161,13.66 J4.49@66.21,13.66
ERXN1: P2.6 R7.6 | length 12.2
  Top Layer w0.254: v2(31.493,23.726) 31.493,23.845 31.264,24.074 31.264,24.958 31.264,25.303 31.376,25.415 31.385,25.415 31.508,25.538 R7.6@31.508,25.738
  Bottom Layer w0.254: v2(31.493,23.726) 31.493,23.607 31.264,23.379 31.264,22.713 31.689,22.288 36.452,22.288 P2.6@38.905,19.835
ERXP: J4.50 R7.4 U2.63 | length 80
  Top Layer w0.254: R7.4@30.628,27.338 30.826,27.536 30.826,27.727 30.871,27.773 30.871,28.335 30.871,28.811 30.642,29.04 v2(30.642,29.159) ; v2@30.871,29.159 30.871,30.868 32.118,32.115 35.518,32.115 37.053,33.65 37.053,37.191 37,37.244 U2.63@37,37.74
  Bottom Layer w0.254: v2(30.642,29.159) 30.642,29.04 30.871,28.811 30.871,27.122 33.422,24.571 42.194,24.571 43.914,22.851 47.793,18.972 47.793,5.69 49.614,3.869 60.89,3.869 62.759,5.738 62.759,11.489 63.651,12.381 67.483,12.381 68.75,13.648 J4.50@68.75,13.66
ERXP1: P2.3 R7.5 | length 12.1
  Top Layer w0.254: R7.5@30.628,25.738 30.826,25.54 30.826,25.349 30.871,25.303 30.871,24.795 30.871,24.074 30.642,23.845 v2(30.642,23.726)
  Bottom Layer w0.254: v2(30.642,23.726) 30.642,23.607 30.871,23.379 30.871,22.55 31.527,21.893 34.354,21.893 35.095,21.153 P2.3@35.095,17.295
ETXN: J4.47 R7.1 U2.66 | length 72.8
  Top Layer w0.254: 32.944,28.459 32.944,29.114 33.48,29.649 36.009,29.649 38.447,32.087 38.447,37.191 38.5,37.244 U2.66@38.5,37.74
  Bottom Layer w0.254: v2(33.173,28.112) 33.173,27.993 32.944,27.764 32.944,27.333 34.19,26.088 42.868,26.088 49.036,19.919 49.036,6.242 50.036,5.243 60.085,5.243 60.856,6.014 60.856,12.65 64.407,16.2 J4.47@66.21,16.2
ETXN1: P2.2 R7.8 | length 9.5
  Top Layer w0.254: R7.8@33.188,25.738 32.99,25.54 32.99,25.349 32.944,25.303 32.944,22.357 31.674,21.087 31.674,19.647 32.323,18.999 32.991,18.999 33.825,19.833 P2.2@33.825,19.835
ETXP: J4.48 R7.2 U2.65 | length 75.7
  Top Layer w0.254: 32.551,28.459 32.551,29.277 33.317,30.043 35.846,30.043 38.053,32.25 38.053,37.191 38,37.244 U2.65@38,37.74
  Bottom Layer w0.254: v2(32.322,28.112) 32.322,27.993 32.551,27.764 32.551,27.17 34.027,25.694 42.705,25.694 48.643,19.756 48.643,6.079 49.944,4.778 60.176,4.778 61.451,6.052 61.451,11.901 64.354,14.804 67.354,14.804 J4.48@68.75,16.2
ETXP1: P2.1 R7.7 | length 9.6
  Top Layer w0.254: R7.7@32.308,25.738 32.308,25.538 32.431,25.415 32.439,25.415 32.551,25.303 32.551,22.521 31.281,21.251 31.281,19.441 32.207,18.515 32.207,17.643 P2.1@32.555,17.295
GND: ?.0 C1.1 C2.1 C3.2 C4.1 C5.2 C6.2 C7.1 C8.1 C9.1 C10.1 C11.1 C12.2 C13.2 C14.1 C21.2 C31.1 C32.1 C46.2 J2.5 J2.6 J3.7 J3.8 J3.9 J3.20 J3.22 J3.25 J3.26 J4.7 J5.6 J5.7 J7.4 P2.8 P6.0 P6.A1 P6.B1 P7.0 P7.A1 P7.B1 P9.0 P9.A1 P9.B1 PWR.2 R8.1 R9.1 R10.2 R11.2 R18.1 R20.1 R21.1 R31.1 S1.3 S2.3 S5.2 U1.1 U2.10 U2.19 U2.27 U2.49 U2.74 U2.99 U3.18 Y1.2 Y1.4 Y3.2 Y3.4 | length 875.6
  Top Layer w0.203: 11.771,77.815 11.919,77.963 14.212,80.256 17.811,80.256 ; v2(17.006,49.051) 17.006,49.413 v1@17.838,50.245 ; ?.0@17.404,79.85 17.811,80.256 ; v1(17.804,50.245) v1@17.838,50.245 ; ?.0@18.092,78.217 17.831,78.479 17.831,80.236 17.811,80.256 ; 19.03,81.476 17.811,80.256 ; C1.1@24.706,39.486 C1.1@25.021,39.802 ; 25.021,41.1 27.098,41.1 27.294,40.904 27.958,40.24 U2.49@29,40.24 30.347,40.24 30.361,40.226 ; v1@25.278,52.176 25.278,52.115 25.049,51.885 25.049,51.488 C4.1@24.706,51.145 23.151,51.145 22.571,51.725 19.318,51.725 v1@17.838,50.245 ; 25.675,52.534 27.041,52.534 28.335,51.24 U2.27@29,51.24 30.019,51.24 31.136,52.357 34.134,52.357 34.399,52.622 34.381,52.64 ; U2.19@34,53.74 34,53.022 34.381,52.64 ; C7.1@36.644,65.059 38.161,63.543 38.161,58.629 38.151,58.62 38.151,58.38 v2(38.059,58.287) ; 37.94,52.577 37.94,51.99 38.69,51.24 41.037,51.24 ; v2(40.047,61.591) 40.047,60.848 C46.2@39.743,60.543 39.954,60.332 40.393,60.332 40.708,60.017 40.708,58.249 38.5,56.041 U2.10@38.5,53.74 38.5,52.75 38.391,52.64 34.381,52.64 ; v2@41.335,43.595 41.593,43.337 41.593,41.041 41.593,39.561 42.5,38.654 U2.74@42.5,37.74 42.5,34.492 42.652,34.34 C2.1@43.346,34.34 C2.1@43.384,34.302 ; 41.404,43.664 38.113,43.664 37.733,44.045 37.733,47.935 41.037,51.24 ; 43.615,44.506 43.615,43.501 43.615,40.083 46.564,37.134 47.051,37.134 47.14,37.223 ; v1(47.14,37.937) 47.14,37.223 ; v2(48.038,38.02) 47.937,38.02 47.14,37.223 ; C3.2@49.039,52.059 48.696,51.717 48.696,51.361 48.575,51.24 U2.99@45,51.24 41.037,51.24
  Top Layer w0.229: v1(25.354,52.227) 25.368,52.227 25.675,52.534
  Top Layer w0.254: v2(12.16,93.334) 13.457,94.632 16.656,94.632 16.818,94.793 C21.2@18.215,94.793 ; v2(13.887,92.515) 14.698,92.515 14.82,92.637 C32.1@14.877,92.58 ; v1@21.831,58.903 22.609,58.903 24.291,60.584 28.229,60.584 28.961,61.316 R18.1@28.986,61.316 29.011,61.316 29.766,60.56 31.259,60.56 31.512,60.813 ; v2(29.863,52.761) 29.917,52.761 30.321,52.357 v1@31.136,52.357 ; v1(31.057,63.325) 31.512,62.87 31.512,60.813 ; v1(33.326,89.642) 33.394,89.71 33.66,89.71 34.312,90.362 R11.2@34.337,90.362 ; U2.19@34,53.74 34,55.145 31.512,57.633 31.512,60.813
  Top Layer w0.381: C1.1@25.021,39.802 25.021,41.1 ; v1@35.666,65.059 35.666,62.734 Y1.2@36.622,61.778
  Top Layer w0.508: v2(2.629,64.889) 2.629,75.901 4.486,77.758 v1@11.078,77.758 ; J3.25@5.25,44.648 J3.26@7.79,44.648 ; J3.9@5.25,64.968 5.056,65.163 4.193,65.163 3.97,65.386 ; J3.26@7.585,44.611 7.62,44.576 8.857,44.576 9.227,44.206 9.227,41.11 8.929,40.812 3.472,40.812 1.328,42.957 1.328,76.853 5.777,81.301 17.225,81.301 18.093,82.169 18.093,83.872 ; J3.8@7.79,67.508 J3.7@5.25,67.508 3.97,66.228 3.97,65.386 ; v1(11.078,77.987) 11.895,77.987 11.919,77.963 15.008,74.875 19.151,74.875 ; 12.267,86.776 17.244,86.776 19.227,84.793 19.227,80.03 ?.0@18.335,79.139 ; v1(13.116,11.455) 13.116,8.082 P7.0@14.526,6.672 ; v1@14.126,11.022 14.098,10.994 14.098,10.975 14.153,10.92 14.153,9.561 P7.A1@15.992,7.722 ; v1@14.153,11.022 14.153,11.542 ; 14.733,14.685 15.351,14.067 15.351,14.285 PWR.2@15.42,14.215 ; P7.0@14.869,3.052 14.897,3.08 P7.0@14.897,6.752 14.897,7.094 15.124,7.321 P7.A1@15.848,7.321 ; P7.0@14.897,2.572 23.402,2.572 P7.0@23.454,2.623 ; v1@16.587,62.747 16.56,62.72 16.56,62.701 v1(16.654,62.606) 16.654,60.162 15.158,58.665 4.267,58.665 3.97,58.963 3.97,65.386 ; v1@16.654,62.747 16.654,64.5 v1@16.654,65.367 ; v1(17.906,74.896) 19.13,74.896 19.151,74.875 ; v2(18.58,18.18) 19.564,18.18 20.072,17.672 U1.1@20.072,17.271 ; v1(21.142,74.832) v1@21.099,74.875 ; v1(21.572,61.185) 23.628,61.185 26.944,64.502 30.128,64.502 v1(30.703,63.926) 30.703,64.485 v1(30.81,64.592) ; P7.B1@22.441,7.316 22.998,7.316 23.065,7.248 23.31,7.248 23.537,7.021 P7.0@23.537,6.752 P7.0@23.537,2.572 ; P7.B1@22.442,7.722 22.442,8.297 22.488,8.343 22.623,8.343 23.699,9.419 ; P7.B1@22.658,7.489 22.824,7.489 ; v2(23.177,30.007) v1@23.177,33.069 ; v1(23.206,33.069) 23.187,33.088 23.187,33.479 22.88,33.785 v1(22.88,33.812) 22.9,33.832 23.782,33.832 25.228,35.277 25.228,38.965 C1.1@24.706,39.486 ; 24.071,9.791 24.572,10.292 C12.2@24.572,11.342 ; v1(24.601,77.535) 24.055,77.535 21.394,74.875 v1@21.099,74.875 ; v1(26.03,57.098) 26.067,57.098 v2(26.834,56.331) ; P9.0@32.907,96.327 33.729,96.327 33.775,96.281 P9.B1@33.775,95.706 ; C8.1@34.688,65.059 v1(35.399,65.059) 35.666,65.059 C7.1@36.644,65.059 ; v2(34.786,58.286) 34.788,58.288 34.788,59.308 Y1.4@34.79,59.31 ; C14.1@35.199,27.21 35.203,27.214 35.203,28.06 v2(35.208,28.064) ; v2(36.583,62.542) 36.622,62.504 Y1.2@36.622,61.778 ; v2@36.903,23.685 37.783,22.805 39.872,22.805 39.929,22.749 ; 37.948,22.749 39.929,22.749 ; v1@38.982,84.411 47.016,84.411 47.034,84.428 47.063,84.428 47.081,84.411 47.098,84.428 47.172,84.428 47.189,84.411 50.435,84.411 v1(50.839,84.815) ; v1(39.479,74.353) 41.681,72.151 41.681,71.051 ; P9.A1@40.225,95.706 40.225,96.281 40.271,96.327 41.093,96.327 41.32,96.554 P9.0@41.32,96.676 ; P2.8@41.445,19.835 41.445,21.232 39.929,22.749 ; C6.2@41.8,65.06 C5.2@44.112,65.06 47.691,65.06 53.214,65.06 57.148,68.993 57.148,73.137 ; C11.1@43.143,71.224 v1@43.143,72.053 ; v2(45.891,8.469) 47.608,6.752 P6.0@50.463,6.752 50.463,7.425 50.845,7.806 51.512,7.806 51.558,7.76 P6.A1@51.558,7.722 ; v2(46.637,2.594) 46.648,2.583 50.452,2.583 P6.0@50.463,2.572 P6.0@59.103,2.572 ; C9.1@46.704,60.576 47.978,60.576 47.991,60.589 v1(47.991,61.497) ; v2(48.048,62.427) 48.457,62.427 v1@48.989,61.894 ; C3.2@49.039,52.059 49.242,52.263 49.521,52.263 v1@52.155,54.897 ; v1@50.886,84.834 50.989,84.937 v1(52.63,84.937) 51.753,85.813 v2(51.538,85.813) ; R20.1@52.159,13.365 52.159,15.02 v2(52.194,15.055) ; v1@52.315,54.775 52.329,54.789 52.329,55.071 52.98,55.722 53.046,55.722 v2(53.085,55.761) ; v2@53.018,55.76 v2(53.609,56.351) ; R21.1@53.873,91.402 53.96,91.489 v1(55.037,91.489) ; R31.1@57.933,13.186 v2(57.933,14.64) ; P6.B1@58.008,7.722 58.008,7.147 58.054,7.101 P6.0@58.876,7.101 ; R31.1@58.237,13.365 59.587,13.365 59.884,13.067 59.884,7.845 59.435,7.396 59.33,7.396 59.103,7.169 P6.0@59.103,6.752 ; J7.4@61.13,66.492 63.216,66.492 64.232,67.508 J4.7@66.21,67.508 ; 19.151,74.875 v1@21.099,74.875
  Top Layer w0.762: J3.22@7.79,49.728 J5.7@12.87,49.728 ; J3.20@7.79,52.268 J5.6@12.87,52.268 ; 20.632,11.375 20.666,11.342 C13.2@22.1,11.342 C13.2@22.894,11.342 ; 23.561,10.007 23.561,10.675 ; 23.699,9.419 23.699,9.869 ; 24.071,9.791 24.071,10.961 24.191,10.961 C12.2@24.572,11.342 ; C12.2@24.071,11.342 23.561,11.342 ; C2.1@43.384,34.302 v1(45.892,34.302) ; C13.2@22.894,11.342 23.561,10.675 ; C13.2@22.894,11.342 23.561,11.342 ; 23.561,10.675 23.561,11.342
  Bottom Layer w0.203: J5.7@12.87,49.728 16.329,49.728 v2(17.006,49.051) 17.006,42.968 20.484,39.49 25.104,39.49 v2(26.429,40.814) ; v1(13.172,66.544) 14.075,66.544 14.202,66.417 v1(14.312,66.417) 14.39,66.34 14.39,66.099 14.394,66.095 14.394,60.267 17.804,56.857 v1(17.804,50.245) ; v2(36.583,62.542) 36.583,60.083 36.583,60.019 37.962,58.64 37.962,58.384 v2(38.059,58.287) 38.059,52.58 v2@37.619,52.14 ; v2(40.047,61.591) 42.675,64.219 v2(42.675,65.053) ; 41.404,43.664 42.264,43.664 43.501,44.902 v2@43.501,44.991 ; v1(45.892,34.302) 46.001,34.302 47.557,35.857 v1(48.298,35.857) 48.874,35.281 v1(49.018,35.281) 49.266,35.034
  Bottom Layer w0.254: v2(12.16,93.334) 12.979,92.515 v2(13.887,92.515) ; v1(13.72,15.034) 13.72,17.484 14.678,18.442 14.678,32.628 18.077,36.027 24.377,36.027 27.172,33.232 35.013,33.232 v1(35.51,33.73) ; v1(23.206,33.069) 24.546,31.728 37.151,31.728 40.349,34.926 41.694,34.926 42.333,34.287 42.333,32.302 40.169,30.138 38.299,30.138 38.115,29.953 37.731,29.953 v1(37.663,29.885) ; v2(26.834,56.331) 29.863,53.302 v2(29.863,52.761)
  Bottom Layer w0.508: 1.202,64.852 1.221,64.871 2.61,64.871 v2(2.629,64.889) 2.676,64.936 5.218,64.936 J3.9@5.25,64.968 ; J3.26@7.79,44.648 6.543,45.895 6.543,48.482 J3.22@7.79,49.728 J3.20@7.79,52.268 ; P7.0@14.897,6.752 14.897,6.953 15.124,7.18 16.497,7.18 17.191,6.486 19.272,6.486 20.378,5.38 22.995,5.38 23.293,5.678 23.293,5.824 23.486,6.017 P7.0@23.486,7.173 ; v1(21.142,74.832) 21.142,72.968 20.411,72.238 20.411,70.758 20.439,70.73 20.439,67.121 21.797,65.763 25.457,65.763 25.994,65.226 v1(25.994,56.185) ; 22.108,13.169 21.116,13.169 20.818,13.467 20.818,22.62 22.902,24.703 28.033,24.703 ; v2(23.177,30.007) 27.816,30.007 27.821,30.001 27.821,27.517 28.054,27.285 28.054,27.269 28.052,27.267 28.052,27.216 28.054,27.214 28.054,24.796 28.052,24.794 28.052,24.75 28.038,24.736 ; 27.822,30.002 29.005,30.002 29.233,29.773 29.253,29.773 29.28,29.8 29.308,29.773 29.327,29.773 29.6,30.045 32.527,30.045 ; 28.002,28.607 32.934,23.675 v2(36.893,23.675) ; S2.3@32.045,79.918 33.786,78.178 36.926,78.178 ; P9.0@32.68,100.856 P9.0@41.32,100.856 ; 33.112,30.16 v2(35.208,28.064) ; 33.938,28.064 v2(35.208,28.064) ; v1(34.223,65.829) 34.973,65.079 35.38,65.079 v1(35.399,65.059) ; v2(34.786,58.286) 36.583,60.083 ; v1@35.405,65.026 35.419,65.012 35.419,64.953 36.583,63.788 v2(36.583,62.542) ; v1(37.889,90.537) 37.908,90.517 37.98,90.517 38.002,90.495 42.165,90.495 42.31,90.35 v1(42.338,90.35) ; P9.0@41.32,96.676 41.32,95.993 42.422,94.891 ; v1(43.077,72.053) 42.397,71.373 37.711,71.373 37.055,72.029 37.055,78.049 36.926,78.178 ; v2(45.891,8.469) 45.891,3.34 v2(46.637,2.594) ; P6.0@50.463,6.752 50.463,7.435 49.724,8.174 49.724,16.915 50.672,17.864 52.126,17.864 ; v2(51.538,85.813) v1@52.522,84.829 ; 52.231,13.169 52.212,13.187 v2@52.212,15.037 ; v1@52.597,84.904 52.635,84.904 52.635,80.824 51.631,79.82 48.653,79.82 S1.3@48.555,79.918 46.814,78.178 36.926,78.178 ; v2(53.085,55.761) 53.609,56.285 v2(53.609,56.351) 53.609,61.962 56.081,64.434 ; v1(57.178,69.448) 54.265,69.448 53.675,68.859 53.675,66.84 56.081,64.434 ; 57.803,13.169 57.803,14.454 57.933,14.585 v2(57.933,14.64) 52.609,14.64 v2@52.212,15.037 ; J4.7@66.21,67 v1(64.061,67) 61.913,67 61.405,66.492 J7.4@61.13,66.492 58.139,66.492 56.081,64.434 ; v2(35.208,28.064) 43.346,28.064 47.825,23.585 52.126,19.284 52.126,17.864 ; 52.126,17.864 52.194,17.796 v2(52.194,15.055) v2@52.212,15.037
  Bottom Layer w0.762: J5.7@12.87,49.728 J5.6@12.87,52.268
  other v1: 70.763,1.036 26.238,1.076 21.243,1.341 10.913,1.477 71.877,1.535 19.358,1.659 1.83,1.768 25.51,2.095 18.084,2.168 43.57,2.587 53.263,2.587 56.439,2.608 32.582,2.641 39.817,2.649 72.915,2.65 37.503,2.701 11.496,3.536 1.805,3.988 73.126,4.302 1.657,5.098 73.146,5.551 25.342,5.882 12.978,5.945 73.261,6.896 12.838,7.142 25.462,7.156 45.134,8.441 45.901,9.303 11.69,9.447 25.314,9.856 73.242,10.047 12.103,10.651 49.879,10.92 14.079,11.022 55.823,11.699 53.745,11.752 24.864,12.272 73.261,12.256 13.42,12.594 56.021,12.65 34.658,12.784 49.866,13.058 53.745,13.15 35.889,13.479 34.782,13.691 60.699,13.843 33.756,13.942 14.09,14.102 56.502,14.326 73.142,14.389 53.745,14.548 60.992,14.955 0.658,15.321 56.488,15.439 73.285,15.75 53.745,15.947 55.787,16.089 58.381,16.097 61.44,16.24 49.899,16.308 18.464,17.209 53.745,17.345 55.787,17.487 13.883,17.647 59.401,17.892 73.285,17.936 0.66,18.077 30.085,18.307 49.98,18.516 53.745,18.743 55.787,18.885 14.043,19.363 20.875,19.515 18.511,19.584 73.285,19.636 21.876,19.674 61.4,19.83 49.939,20.136 53.745,20.142 58.666,20.238 55.787,20.284 15.116,20.641 18.384,20.645 0.663,20.834 53.745,21.54 55.787,21.682 40.94,22.087 73.285,22.227 49.79,22.321 38.972,22.354 58.299,22.4 29.5,22.941 53.745,22.938 55.787,23.08 34.208,23.101 37.578,23.242 0.666,23.59 33.779,23.756 29.307,23.83 48.14,23.9 53.745,24.337 55.787,24.479 73.285,24.818 51.942,25.085 29.354,25.167 46.49,25.409 53.745,25.735 55.787,25.877 0.669,26.093 24.042,26.394 29.199,26.641 24.927,26.832 41.741,26.942 51.395,26.992 45.643,27.041 53.745,27.133 34.419,27.192 55.787,27.275 41.095,27.377 44.27,27.366 73.285,27.408 29.497,27.817 48.502,27.912 36.442,27.99 52.868,28.034 0.672,28.494 44.312,28.61 55.787,28.674 29.37,28.85 43.067,29.061 51.869,29.05 36.896,29.118 48.305,29.227 22.184,29.381 54.91,29.574 29.28,29.753 73.285,29.999 50.869,30.066 45.697,30.52 53.911,30.591 49.87,31.083 0.674,31.25 52.912,31.607 46.581,31.865 48.871,32.099 73.285,32.589 51.912,32.623 47.871,33.115 50.913,33.64 46.872,34.132 36.154,34.512 49.914,34.656 73.285,35.18 45.667,35.369 0.677,35.784 43.756,37.499 73.285,37.77 46.099,38.078 45.416,38.792 42.108,39.112 30.884,40.323 73.285,40.361 27.781,40.494 43.666,40.848 41.455,41.041 31.651,41.067 32.568,41.92 41.455,42.14 43.666,42.175 73.285,42.952 43.666,43.501 38.497,43.581 37.856,43.882 41.455,44.339 9.694,45.324 41.455,45.439 73.285,45.542 43.666,46.153 10.022,46.183 73.285,48.133 17.394,49.703 73.285,50.723 24.005,50.975 21.147,51.985 20.451,52.016 21.833,52.031 32.808,52.173 31.258,52.37 36.983,52.591 28.684,53.012 73.285,53.314 27.737,53.605 29.562,53.643 52.309,54.742 73.285,55.905 52.751,56.733 21.739,57.13 53.764,57.227 37.67,57.426 25.913,57.795 21.739,58.057 73.285,58.495 15.242,58.741 21.739,58.984 56.638,59.029 53.498,59.205 54.462,59.276 15.562,59.352 57.343,59.458 14.713,59.543 21.739,59.911 34.79,60.214 48.181,60.474 36.69,60.706 10.315,60.89 9.301,61.01 73.285,61.086 43.055,61.291 47.272,61.476 38.68,61.696 40.889,61.96 48.995,62.027 45.077,62.194 43.026,62.265 48.459,63.221 45.652,63.532 2.577,63.571 16.54,63.583 49.378,63.626 73.285,63.676 43.021,64.268 16.598,64.5 38.541,64.636 45.883,64.709 46.773,64.811 44.709,64.878 47.691,64.978 38.364,65.538 16.676,65.63 53.672,65.66 57.947,65.887 37.675,66.011 73.285,66.267 59.214,66.31 54.266,66.33 62.983,66.627 54.866,66.771 2.56,66.952 40.738,67.618 49.342,67.758 18.459,67.866 50.271,67.891 25.311,68.114 27.128,68.294 41.281,68.322 26.249,68.747 73.285,68.857 2.625,69.011 19.432,69.029 49.09,69.138 26.909,69.16 53.929,69.189 56.434,69.357 54.713,69.428 20.119,69.716 70.547,70.793 20.392,70.849 18.931,70.885 11.419,71.369 73.285,71.448 2.56,71.499 31.256,71.558 32.19,71.558 33.115,71.558 34.299,71.558 40.448,71.71 20.156,71.982 41.136,72.043 53.494,72.411 47.64,72.552 56.686,72.589 55.776,72.672 54.758,72.692 51.329,72.732 49.104,72.752 57.845,72.825 42.066,73.105 2.56,73.794 49.95,73.796 52.045,73.846 73.285,74.039 37.577,74.292 51.559,74.577 53.091,74.682 57.384,74.717 54.198,74.925 55.687,74.925 28.956,75.476 38.65,75.582 34.606,76.41 61.701,76.449 27.483,76.547 50.426,76.724 64.806,76.83 1.595,76.925 67.605,77.339 40.146,77.365 14.44,77.523 48.303,77.64 34.574,77.906 2.667,77.912 61.463,78.071 69.615,78.154 45.313,78.171 5.877,78.234 24.601,78.463 10.058,78.536 67.88,78.663 38.968,78.67 11.653,79.075 65.604,79.116 13.852,79.182 6.717,79.226 4.023,79.312 12.686,79.512 45.014,79.751 5.079,80.411 34.383,80.708 23.437,81.597 24.415,84.321 26.899,84.321 29.382,84.321 31.865,84.321 34.349,84.321 38.825,84.331 41.327,84.424 44.929,84.424 47.081,84.448 71.021,84.469 66.401,84.6 72.96,84.708 3.798,84.716 1.952,84.779 2.521,85.917 17.643,86.242 1.005,86.576 16.635,86.74 13.255,86.753 14.326,86.804 27.639,87.22 25.954,87.378 33.273,87.395 32.009,87.483 34.765,87.518 30.851,87.536 72.998,87.732 23.894,87.77 35.695,87.834 1.005,87.896 58.33,88.312 10.413,88.392 24.936,88.413 36.327,88.571 11.768,88.741 44.146,88.792 72.998,89.131 1.005,89.216 24.076,89.22 37.064,89.466 30.794,89.498 31.741,89.498 28.167,89.558 26.777,89.819 21.989,89.937 23.971,90.01 72.998,90.529 1.005,90.536 58.846,90.577 26.061,90.633 12.2,90.877 23.76,91.186 35.81,91.199 10.201,91.241 26.018,91.643 1.005,91.856 38.047,91.853 72.998,91.927 23.199,92.011 58.717,92.111 42.337,92.534 44.305,92.536 41.293,92.544 25.822,92.728 60.12,92.953 33.3,93.062 1.005,93.176 58.604,93.234 72.998,93.326 25.182,93.358 33.007,93.949 1.005,94.496 72.998,94.724 43.324,95.268 64.399,95.36 60.733,95.387 62.106,95.414 63.239,95.44 1.005,95.816 66.463,95.837 54.671,95.955 68.533,96.084 72.998,96.122 52.257,96.617 1.005,97.136 24.962,97.478 26.235,97.514 72.998,97.521 45.567,97.625 55.876,97.762 27.036,97.843 44.165,98.027 1.005,98.456 56.577,98.833 72.998,98.919 57.766,98.954 11.856,99.057 16.736,99.07 12.969,99.186 13.849,99.212 55.122,99.277 22.211,99.308 44.72,99.295 21.371,99.332 1.005,99.776 26.378,99.855 27.499,99.868 36.197,100.748 38.379,100.916 1.005,101.096 58.303,101.271 45.46,101.29 55.486,101.407 56.941,101.529 1.644,102.313 6.38,102.304 7.7,102.304 9.02,102.304 10.34,102.304 11.66,102.304 12.98,102.304 14.301,102.304 15.621,102.304 16.941,102.304 18.261,102.304 19.581,102.304 20.901,102.304 22.221,102.304 23.541,102.304 24.861,102.304 26.181,102.304 27.501,102.304 28.821,102.304 30.141,102.304 53.335,102.524 54.733,102.524 56.132,102.524 57.53,102.524 58.928,102.524 60.327,102.524 61.725,102.524 63.123,102.524
  other v2: 41.404,43.29 43.615,44.878 37.689,52.18
IAP: R14.1 S5.1 U3.10 | length 27.2
  Top Layer w0.254: U3.10@27.615,96.78 27.625,96.789 28.161,96.789 28.546,97.174 v2(28.554,97.174) ; R14.1@47.564,95.462 47.564,97.726 48.547,98.71 48.565,98.71 48.938,99.083 S5.1@48.938,99.583 48.856,99.501 v2(47.91,99.501)
  Bottom Layer w0.254: v2(28.554,97.174) 30.005,98.625 47.034,98.625 v2(47.91,99.501)
KEY: J3.31 R24.1 S2.1 | length 65.4
  Top Layer w0.203: v2(3.99,43.517) 3.351,44.157 3.351,75.904 4.414,76.968 10.077,76.968 14.339,72.706 14.764,72.706 14.764,72.876 14.873,72.985 15.161,72.985 15.27,73.095 15.27,73.382 15.728,73.84 23.867,73.84 S2.1@25.445,75.418
  Bottom Layer w0.203: v2(3.99,43.517) 3.99,38.289 J3.31@5.25,37.028
LED1: J3.19 LED1.2 | length 47.9
  Top Layer w0.203: J3.19@5.25,52.268 6.564,50.955 13.772,50.955 14.41,51.592 14.41,52.745 20.259,58.594 20.259,64.876 27.668,72.284 37.923,72.284 38.431,71.776 LED1.2@38.431,71.051
LED2: J3.21 LED2.2 | length 55.7
  Top Layer w0.203: J3.21@5.25,49.728 3.946,51.032 3.946,53.35 4.313,53.717 14.834,53.717 19.746,58.629 19.746,65.013 27.529,72.796 38.816,72.796 39.587,72.024 39.587,69.515 39.264,69.193 LED2.2@38.431,69.193
LED_CON: R13.1 U3.12 | length 40.1
  Top Layer w0.203: U3.12@21.621,96.129 23.311,96.129 v2(23.323,96.117)
  Top Layer w0.254: v2(51.862,86.755) 53.497,86.755 53.908,87.166 53.908,88.231 R13.1@53.873,88.266
  Bottom Layer w0.203: v2(23.323,96.117) 25.186,96.117 28.904,92.4 28.904,87.86 30.008,86.755 v2(51.862,86.755)
NC: U2.73
NetC13_1: C13.1 S3.1 U1.2 | length 194.6
  Top Layer w0.762: U1.2@22.256,17.271 U1.2@22.178,17.193 ; C13.1@22.178,14.214 U1.2@22.178,17.193 ; C13.1@22.178,14.214 22.607,14.643 22.607,16.763 U1.2@22.178,17.193 ; C13.1@22.178,14.214 C13.1@22.1,14.136 21.883,14.353 v2(21.883,15.25) 21.883,16.897 U1.2@22.178,17.193
  Bottom Layer w0.762: v2(21.883,15.25) 21.891,15.242 22.607,15.242 24.323,16.958 29.773,16.958 31.554,15.176 40.708,15.176 42.021,16.489 46.216,16.489 46.989,15.716 46.989,3.923 49.877,1.034 68.92,1.034 71.914,4.028 71.914,10.998 71.914,79.387 70.341,80.96 56.927,80.96 55.863,82.025 55.863,91.831 55.708,91.986 55.708,94.742 57.729,96.762 63.946,96.762 64.92,97.737 S3.1@64.92,100.252
  other v2: 22.658,15.242
NetD2_2: D2.2 R13.2 | length 3.2
  Top Layer w0.254: D2.2@49.139,88.266 R13.2@52.333,88.266
NetD3_2: D3.2 R21.2 | length 3.1
  Top Layer w0.254: D3.2@49.139,91.402 52.273,91.402 R21.2@52.28,91.409
NetJ3_6: J3.6 R5.1 | length 7.4
  Top Layer w0.203: J3.6@7.79,70.048 7.793,70.046 14.862,70.046 R5.1@15.127,70.311
NetJ3_10: J3.10 J5.1 | length 5.1
  Top Layer w0.203: J3.10@7.79,64.968 J5.1@12.87,64.968
NetLED1_1: LED1.1 R2.2 | length 7.4
  Top Layer w0.254: R2.2@29.758,71.051 30.028,70.781 36.621,70.781 LED1.1@36.891,71.051
NetLED2_1: LED2.1 R3.2 | length 7.1
  Top Layer w0.254: R3.2@29.758,69.193 LED2.1@36.891,69.193
NetP2_9: P2.9 R28.2 | length 28.6
  Top Layer w0.254: P2.9@30.38,6.043 32.116,7.778 39.647,15.309 40.324,15.309 42.781,17.767 42.781,22.073 40.618,24.236 38.35,24.236 37.973,24.613 R28.2@37.973,25.741
NetP2_12: P2.12 R29.2 | length 30.1
  Top Layer w0.254: R29.2@39.605,25.741 41.094,25.741 43.518,23.318 43.518,17.665 38.551,12.698 38.551,6.432 40.181,4.802 42.389,4.802 P2.12@43.63,6.043
NetP6_A5: P6.A5 R20.2 | length 4.7
  Top Layer w0.203: R20.2@52.159,11.825 52.159,10.19 53.533,8.815 P6.A5@53.533,7.722
NetP6_B5: P6.B5 R31.2 | length 5.1
  Top Layer w0.323: P6.B5@56.533,7.722 56.533,9.144 58.237,10.848 R31.2@58.237,12.123
NetP7_A5: P7.A5 R8.2 | length 11.1
  Top Layer w0.203: v2(14.986,15.967) 15.07,16.051 15.07,17.183 R8.2@15.327,17.44 ; v2(17.783,10.061) 17.783,9.93 17.967,9.746 P7.A5@17.967,7.722
  Bottom Layer w0.203: v2(14.986,15.967) 14.986,14.581 17.817,11.75 17.817,10.095 v2(17.783,10.061)